# Altium PCB PlacaHalls.PcbDoc
Units mm, origin at the board's own origin, x right, y up, seen from the top; angles counter-clockwise.
Board outline 75 x 75 mm, 2 copper layers (Top Layer, Bottom Layer); 8 components, 5 nets, 14 pads, 0 vias.
Unrouted connection lines stored in the file: 3.
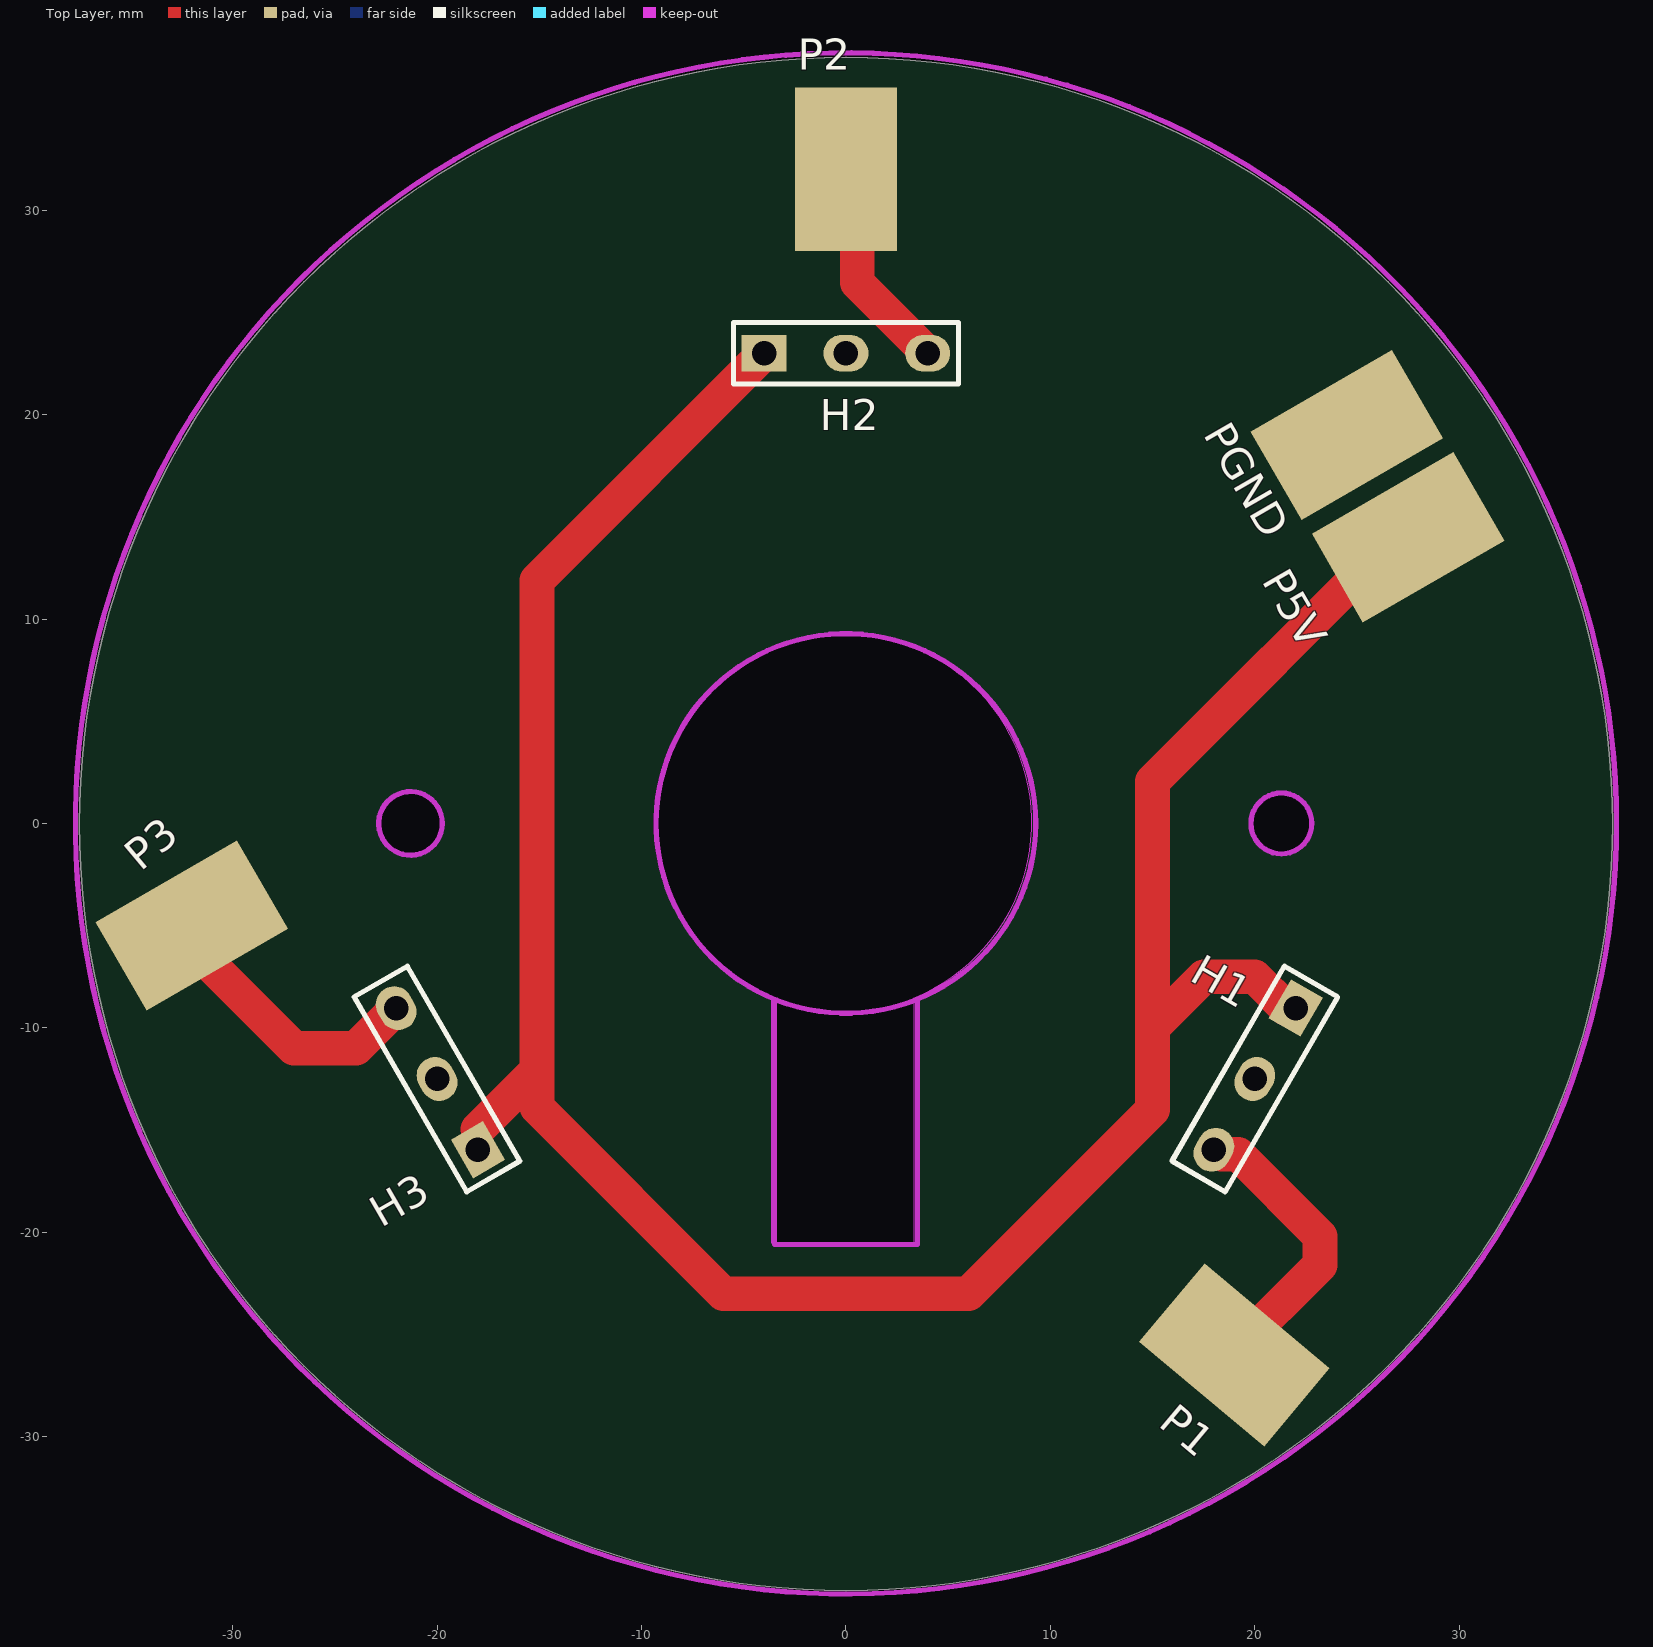
[diagram p0: Top Layer view]
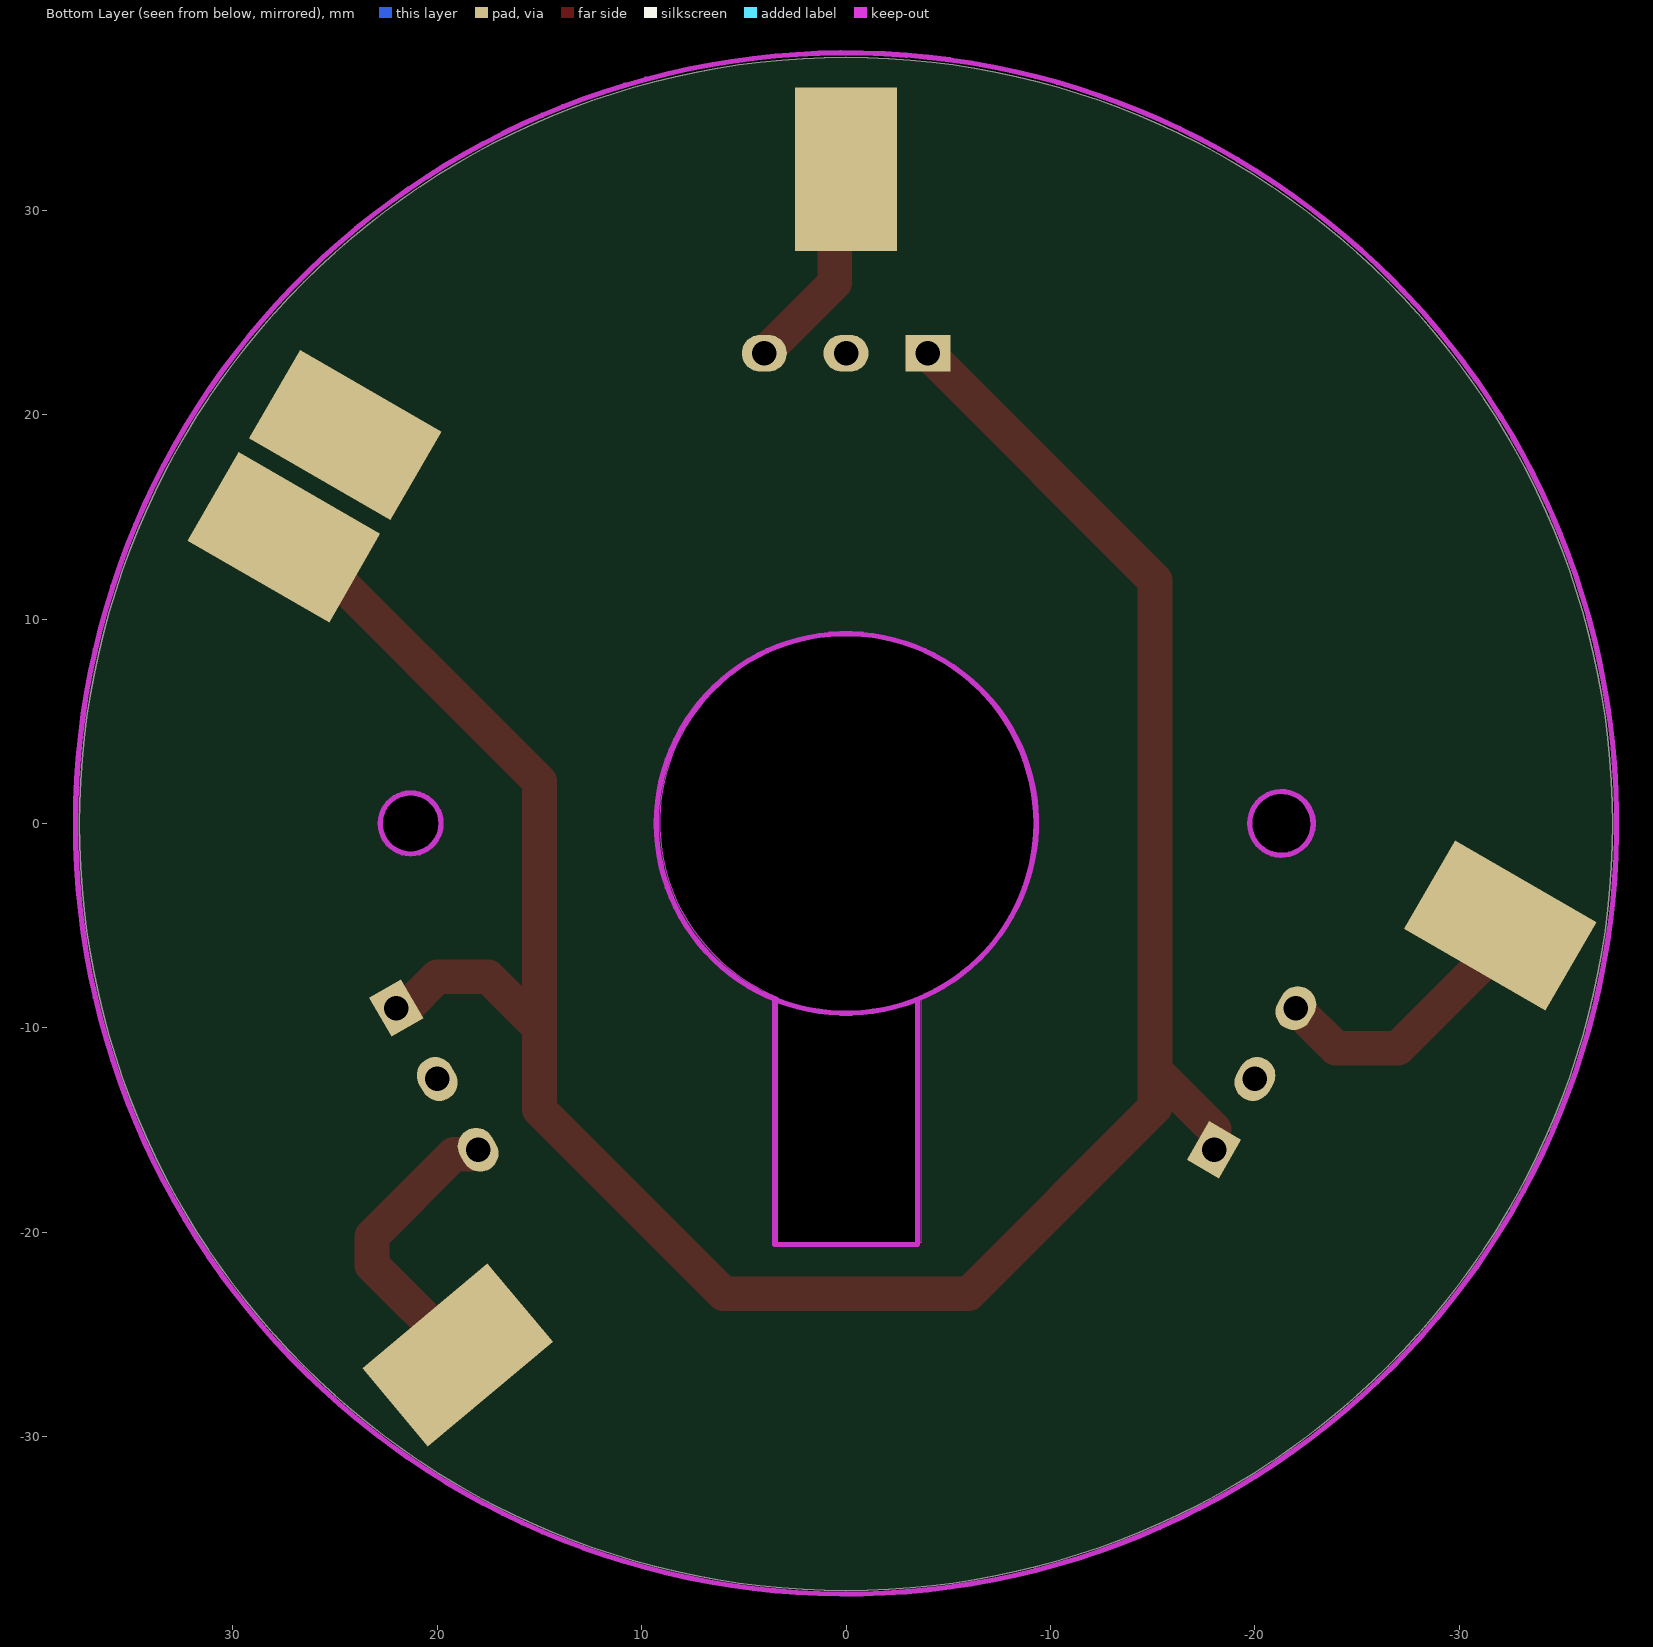
[diagram p1: Bottom Layer view, seen from below]

## Layer stack, top to bottom
Top Solder: solder mask 0.0102, Solder Resist, Dk 3.5
Top Layer: signal copper 0.0356
Dielectric 1: dielectric 0.32, FR-4, Dk 4.8
Bottom Layer: signal copper 0.0356
Bottom Solder: solder mask 0.0102, Solder Resist, Dk 3.5

## Board outline
-37.496,-0.028 ccw(c0.004,-0.028) 0.004,-37.528 ccw(c0.004,-0.028) 37.504,-0.028 ccw(c0.004,-0.028) 0.004,37.472 ccw(c0.004,-0.028)
cut-out: 19.754,-0.028 ccw(c21.254,-0.028) 21.254,-1.528 ccw(c21.254,-0.028) 22.754,-0.028 ccw(c21.254,-0.028) 21.254,1.472 ccw(c21.254,-0.028)
cut-out: -21.246,-1.528 cw(c-21.246,-0.028) -22.746,-0.028 cw(c-21.246,-0.028) -21.246,1.472 cw(c-21.246,-0.028) -19.746,-0.028 cw(c-21.246,-0.028)
cut-out: -3.658,-20.518 3.342,-20.518 3.342,-8.518 ccw(c-0.158,0.045) -3.658,-8.518

## Design rules (kind name [scope] priority, off if disabled: settings)
Clearance Clearance_2 [All] p1: gap=0 ignorepadtopadclearanceinfootprint=FALSE
Clearance Clearance_1 [GND] p2: gap=0.5 ignorepadtopadclearanceinfootprint=FALSE
Clearance [All] p3: gap=0.254 ignorepadtopadclearanceinfootprint=FALSE ismatrix=TRUE
ComponentClearance [All] p1: gap=0 collisioncheckmode=3 verticalgap=0 showdistances=FALSE
HoleToHoleClearance [All] p1: gap=0 allowstackedmicrovias=TRUE
MinimumSolderMaskSliver [All] p1: minsoldermaskwidth=0
PlaneClearance [All] p1: clearance=0.5
PolygonConnect PolygonConnectStyle_1 [All] p1: connectstyle=Relief reliefconductorwidth=0 reliefentries=2 polygonreliefangle="45 Angle" airgapwidth=0
PolygonConnect [All] p2: connectstyle=Direct reliefconductorwidth=0 reliefentries=4 polygonreliefangle="90 Angle" airgapwidth=0
RoutingVias [All] p1: holewidth=0.711 width=1.27 viastyle="Through Hole" minholewidth=0.711 minwidth=1.27 maxholewidth=0.711 maxwidth=1.27
SilkToSilkClearance [All] p1: silktosilkclearance=0
SilkToSolderMaskClearance [IsPad] p1: minsilkscreentomaskgap=0 clearancetoexposedcopper=TRUE
SolderMaskExpansion [All] p1: expansion=0.102 istentingtop=FALSE
Width MaxMinWidth_1 [All] p1: maxlimit=10 minlimit=0.254 preferedwidth=0.254 minimp=50.000000 maximp=50.000000 favimp=50.000000
Width [All] p2: maxlimit=0.254 minlimit=0.254 preferedwidth=0.254
24 further rules are at their usual default settings.

## Classes and differential pairs
component class PlacaHalls: H1 H2 H3 P1 P3 P5V PGND

## Components (designator, comment, footprint, x,y, rotation, side; value= is the part's Value field where it differs from the comment)
H1 "HALL" Hall_Sensor 22,-9.036 r240 top
H2 "HALL" Hall_Sensor -4,23 r0 top
H3 "HALL" Hall_Sensor -18,-15.964 r120 top
P1 "PAD" PAD#1 19,-26 r60 top
P2 "PAD" PAD#2 0,32 r0 top
P3 "PAD" PAD#3 -32,-5 r60 top
P5V "PAD" PAD#4 27.5,14 r0 top
PGND "PAD" PAD#2 24.5,19 r300 top

## Footprints (in the part's own frame and the unit in brackets; to place one, negate y for a bottom-side part, rotate by r counter-clockwise, add the part's x,y. Pads: shape width x height; smd on the part's side, far side on the other; paste and mask are expansions set on the pad)
Hall_Sensor [mm]
  rect 2.2x1.8 hole 1.2: 1(0,0)
  oval 2.2x1.8 hole 1.2: 2(4,0) 3(8,0)
  silkscreen extent -1.5,-1.5 9.5,1.5
PAD#1 [mm]
  rect 5x8 all layers, no hole rot 170: 1(0,0)
PAD#2 [mm]
  rect 5x8 all layers, no hole: 1(0,0)
PAD#3 [mm]
  rect 5x8 all layers, no hole rot 60: 1(0,0)
PAD#4 [mm]
  rect 5x8 all layers, no hole rot 120: 1(0,0)

## Part data
H1 H2 H3: "HALL SENSOR"

## Nets (pads, with @x,y where several pads share a name; then routed paths per layer and width w, separated by ;. In a path a pad name is that pad's centre, name@x,y a point inside that pad or via, vN(x,y) a via of type N, cw(c..) or ccw(c..) an arc to the next point about the centre after c; other vN are vias at no path point)
+5: H1.1 H2.1 H3.1 P5V.1 | length 125.5
  Top Layer w1.7: H3.1@-18,-14.964 -15.116,-12.081 ; H2.1 -4.2,23 -4.25,22.95 -4.25,22.75 -15.116,11.884 -15.116,-12.081 ; H1.1@21.983,-9.053 21.553,-9.053 20,-7.5 17.5,-7.5 15,-10 ; H1.1 H1.1@22.049,-8.986 ; P5V.1 26.951,14 15,2.049 15,-10 ; -15.116,-12.081 -15.116,-13.884 -6,-23 6,-23 15,-14 15,-10
GND: H1.2 H2.2 H3.2 PGND.1
NetH1_3: H1.3 P1.1 | length 14.5
  Top Layer w1.7: H1.3 18.008,-15.956 18.146,-15.956 18.377,-16.187 19.187,-16.187 23.189,-20.189 23.189,-21.598 19,-25.787 P1.1
NetH2_3: H2.3 P2.1 | length 10.7
  Top Layer w1.7: P2.1 0.554,31.446 0.554,26.446 3.781,23.219 3.781,23.046 3.808,23.019 H2.3@3.981,23.019
NetH3_3: H3.3 P3.1 | length 13.9
  Top Layer w1.7: P3.1 -32,-6 -27,-11 -23.964,-11 H3.3

## Keep-outs
Keep-Out Layer:
  circle w0.254: c0,0 r37.696
  circle w0.254: c-21.3,0 r1.558
  circle w0.254: c21.3,0 r1.49
  circle w0.254: c0,0 r9.284
  lines w0.254: -3.496,-8.714 -3.496,-20.59 2.41,-20.59 3.504,-20.59 ; 3.504,-8.59 3.504,-20.59 ; 3.504,-20.59 3.504,-20.59

## Silkscreen, mask and mechanical layers (free items; w line width, h text height)
Mechanical 1:
  circle w0.013: c0.004,-0.028 r37.5
  circle w0.013: c21.254,-0.028 r1.5
  circle w0.013: c-21.246,-0.028 r1.5
  lines w0.013: -3.496,-20.59 -3.496,-8.59 cw(c0.004,-0.028) 3.504,-8.59 3.504,-20.59 -3.496,-20.59